# Altium PCB PCB1.PcbDoc
Units mil, origin at the board's own origin, x right, y up, seen from the top; angles counter-clockwise.
Board outline 1525.59 x 1230.31 mil, 2 copper layers (Top Layer, Bottom Layer); 34 components, 34 nets, 103 pads, 12 vias.
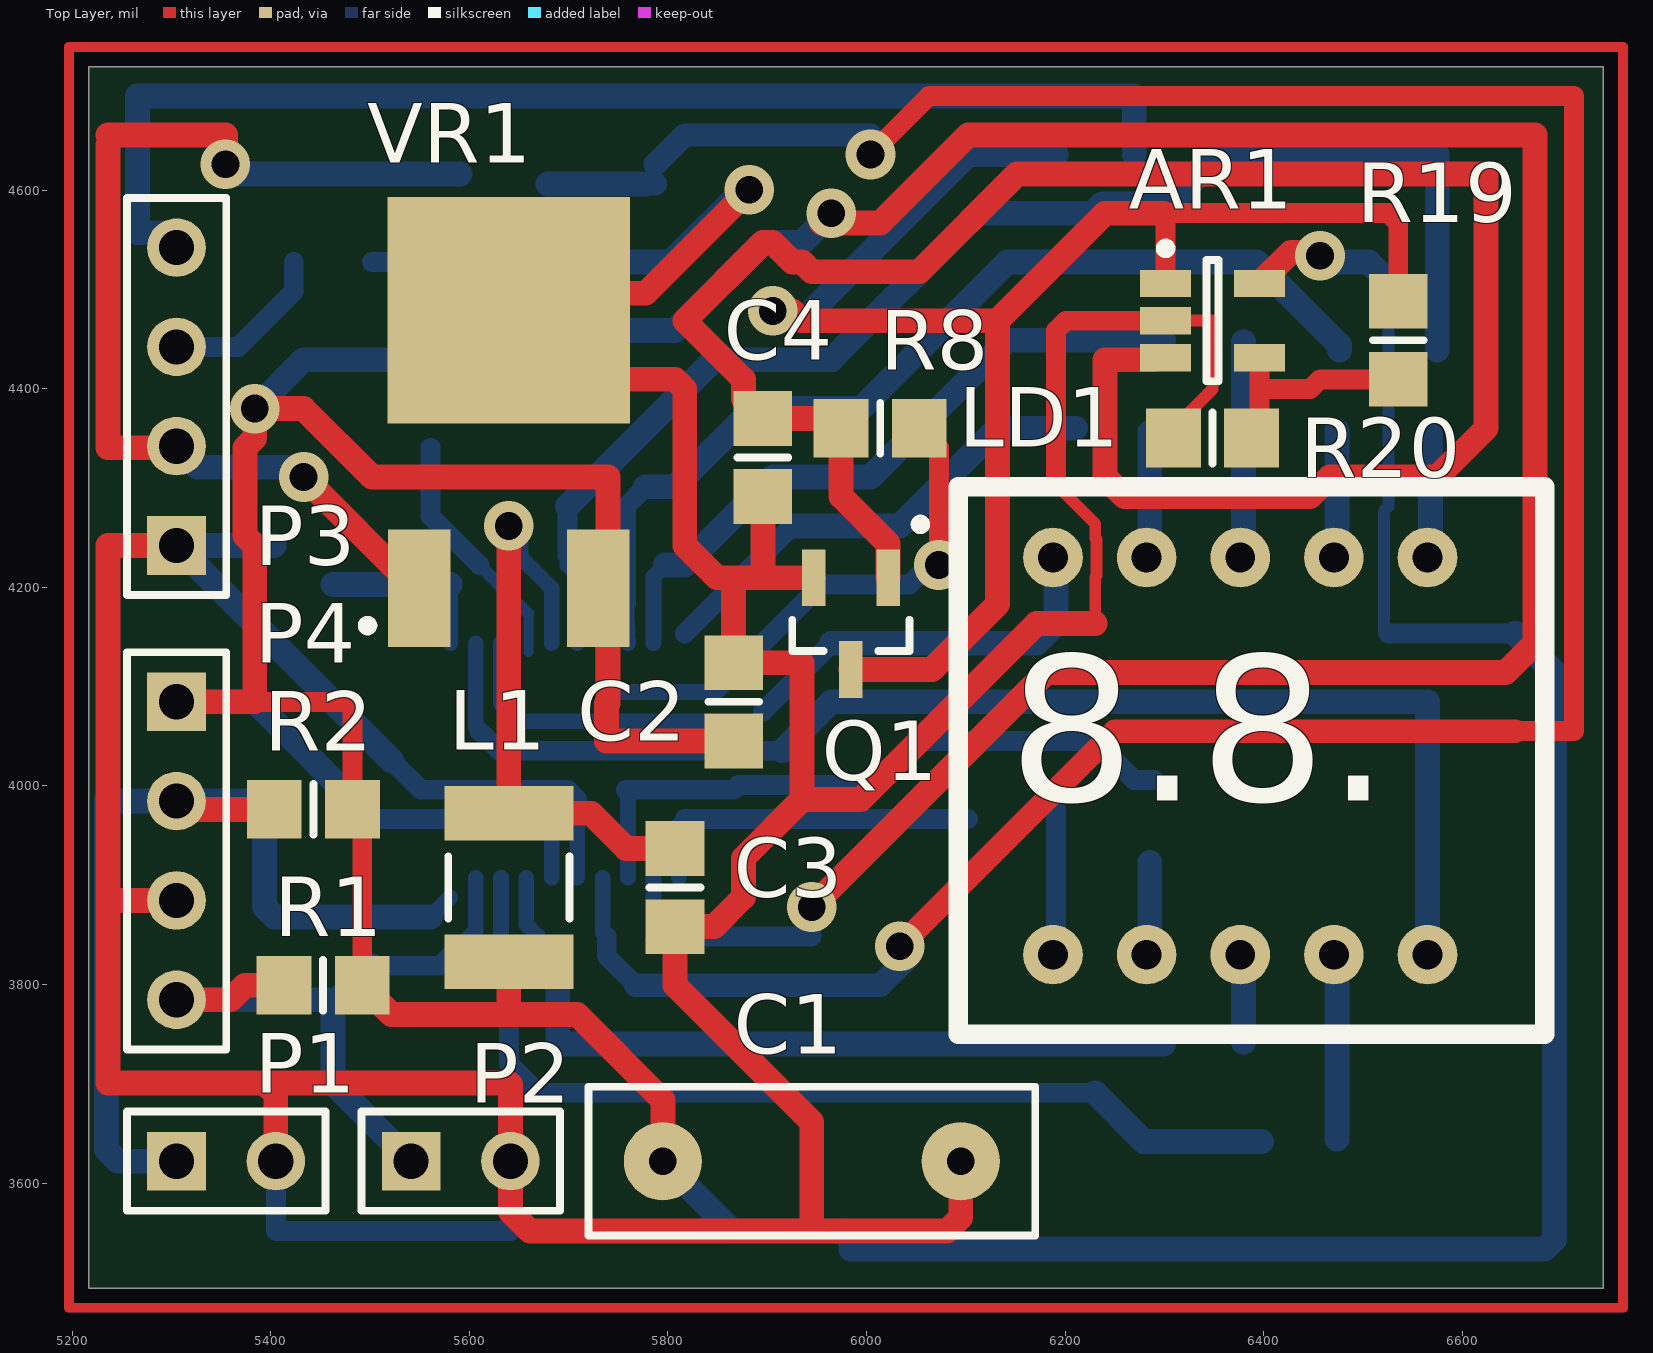
[diagram p0: Top Layer view]
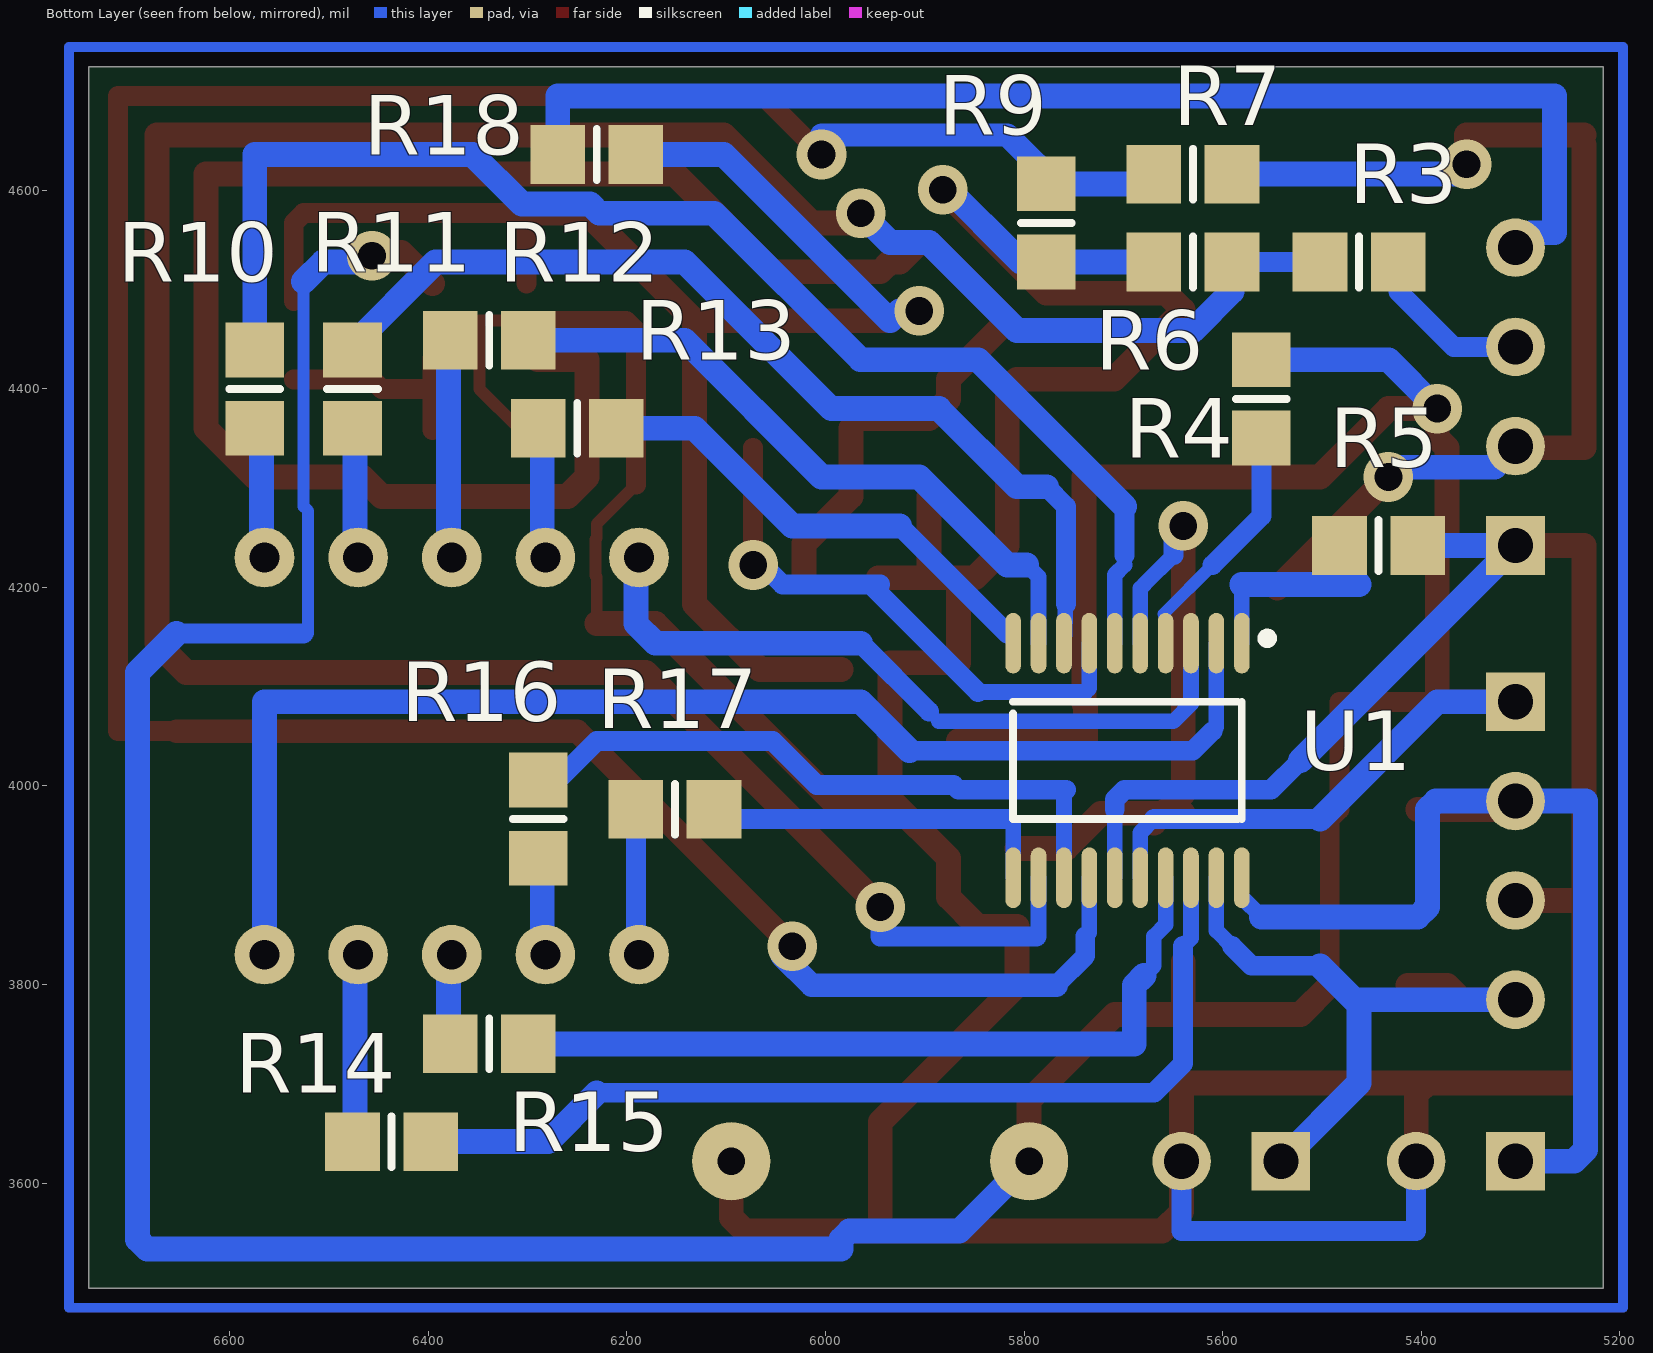
[diagram p1: Bottom Layer view, seen from below]

## Layer stack, top to bottom
Top Layer: signal copper 1.4
Dielectric: dielectric 12.6, FR-4, Dk 4.8
Bottom Layer: signal copper 1.4

## Board outline
5216.54,3494.09 6742.13,3494.09 6742.13,4724.41 5216.54,4724.41

## Design rules (kind name [scope] priority, off if disabled: settings)
AssemblyTestPointUsage [All] p1 off:
AssemblyTestpoint [All] p1 off: testpointundercomponent=TRUE minsize=40 maxsize=100 preferedsize=60 minholesize=0 maxholesize=40 preferedholesize=32 testpointgrid=1 usegrid=TRUE gridtolerance=0.01 allowsidetop=TRUE allowsidebottom=TRUE
Clearance Clearance_1 [All] p1: gap=7.87
Clearance Polygon [All vs IsRegion] p2: gap=78.74
FabricationTestPointUsage [All] p1 off: valid=0 allowmultiple=FALSE
FabricationTestpoint [All] p1 off: side=3 testpointundercomponent=TRUE minsize=40 maxsize=100 preferedsize=60 minholesize=0 maxholesize=40 preferedholesize=32 testpointgrid=1 allowsidetop=TRUE allowsidebottom=TRUE usegrid=TRUE gridtolerance=0.01
MinimumSolderMaskSliver [All] p1 off: minsoldermaskwidth=10
PasteMaskExpansion [All] p1 off: expansion=0
PolygonConnect [All] p1: connectstyle=Relief reliefconductorwidth=10 reliefentries=4 polygonreliefangle="90 Angle" airgapwidth=10
RoutingVias [All] p1: holewidth=28 width=50 viastyle="Through Hole" minholewidth=28 minwidth=50 maxholewidth=28 maxwidth=50
SilkToSilkClearance [All] p1 off: silktosilkclearance=10
SilkscreenOverComponentPads [All] p1 off: minsilkscreentomaskgap=10
SolderMaskExpansion [All] p1 off: expansion=4
Width [All] p1 off: maxlimit=10 minlimit=10 preferedwidth=10
20 further rules are at their usual default settings.

## Components (designator, comment, footprint, x,y, rotation, side; value= is the part's Value field where it differs from the comment)
AR1 "MCP6001" SOT23-5_M 6348.43,4468.5 r0 top
C1 "Cap Pol1" RAD-0.3 5944.88,3622.05 r0 top
C2 "Cap" 6-0805_M 5866.14,4084.65 r270 top
C3 "Cap" 6-0805_M 5807.09,3897.64 r90 top
C4 "Cap" 6-0805_M 5895.67,4330.71 r90 top
L1 "Inductor" INDC4532 5639.76,3897.64 r270 top
LD1 "BD-E323RD" DD-04 6092.52,3750 r0 top
P1 "Header 2" HDR1X2 5305.12,3622.05 r0 top
P2 "Header 2" HDR1X2 5541.34,3622.05 r0 top
P3 "Header 4" HDR1X4 5305.12,4242.13 r90 top
P4 "Header 4" HDR1X4 5305.12,4084.65 r270 top
Q1 "NPN_SIGNAL" SOT23_M 5984.25,4163.39 r270 top
R1 "4.7K" 6-0805_M 5452.76,3799.21 r180 top
R2 "4.7K" 6-0805_M 5442.91,3976.38 r180 top
R3 "0R" 6-0805_M 5462.6,4527.56 r0 bottom
R4 "1K" 6-0805_M 5561.02,4389.76 r270 bottom
R5 "1K" 6-0805_M 5442.91,4242.13 r0 bottom
R6 "HiZ" 6-0805_M 5629.92,4527.56 r0 bottom
R7 "10K" 6-0805_M 5629.92,4616.14 r0 bottom
R8 "1K" 6-0805_M 6013.78,4360.24 r0 top
R9 "1K" 6-0805_M 5777.56,4566.93 r270 bottom
R10 "200" 6-0805_M 6574.8,4399.61 r90 bottom
R11 "200" 6-0805_M 6476.38,4399.61 r90 bottom
R12 "200" 6-0805_M 6338.58,4448.82 r180 bottom
R13 "200" 6-0805_M 6250,4360.24 r180 bottom
R14 "200" 6-0805_M 6437.01,3641.73 r0 bottom
R15 "200" 6-0805_M 6338.58,3740.16 r0 bottom
R16 "200" 6-0805_M 6289.37,3966.54 r270 bottom
R17 "200" 6-0805_M 6151.57,3976.38 r0 bottom
R18 "10K-100K" 6-0805_M 6230.31,4635.83 r180 bottom
R19 "0R" 6-0805_M 6535.43,4448.82 r90 top
R20 "HiZ" 6-0805_M 6348.43,4350.39 r0 top
U1 "STM32F050F4P6" TSOP20 5708.66,4025.59 r270 bottom
VR1 "Volt Reg" DPAK 5639.76,4429.13 r90 top

## Footprints (in the part's own frame and the unit in brackets; to place one, negate y for a bottom-side part, rotate by r counter-clockwise, add the part's x,y. Pads: shape width x height; smd on the part's side, far side on the other; paste and mask are expansions set on the pad)
6-0805_M [mm] "Chip Resistor, Body 2.0x1.2mm, IPC Low Density"
  rect 1.4x1.5 smd: 1(-1,0) 2(1,0)
  silkscreen extent 0,-0.65 0,0.65, body extent -1.07,-0.7 1.07,0.7, height 0.7
DD-04 [mil] "светодиодный цифровой индикатор"
  round 60 hole 30: 1(95.28,80) 2(189.57,80) 3(283.86,80) 4(378.15,80) 5(472.44,80) 6(472.44,480) 7(378.15,480) 8(283.86,480) 9(189.57,480) 10(95.28,480)
  silkscreen extent 0,0 591,551
DPAK [mm]
  rect 3x1.6 smd: 1(-5.842,2.286) 3(-5.842,-2.286)
  rect 5.8x6.2 smd: 2(1.27,0)
  silkscreen extent -6.92,3.49 -6.68,3.74
HDR1X2 [mm] "Connector; Header; 2 Position"
  rect 1.5x1.5 hole 0.9: 1(0,0)
  round 1.5 hole 0.9: 2(2.54,0)
  silkscreen extent -1.27,-1.27 3.81,1.27
HDR1X4 [mm] "Connector; Header; 4 Position"
  rect 1.5x1.5 hole 0.9: 1(0,0)
  round 1.5 hole 0.9: 2(2.54,0) 3(5.08,0) 4(7.62,0)
  silkscreen extent -1.27,-1.27 8.89,1.27
INDC4532 [mm] "Chip Inductor, Body 4.5x3.2mm, IPC High Density"
  rect 1.4x3.3 smd: 1(-1.9,0) 2(1.9,0)
  silkscreen extent -0.8,-1.55 0.8,1.55, body extent -2.4,-1.7 2.4,1.7, height 0.55
RAD-0.3 [mm] "Radial Cap, Thru-Hole; 2 Leads; 0.3 in Pin Spacing"
  round 2 hole 0.7: 1(-3.81,0) 2(3.81,0)
  silkscreen extent -5.71,-1.91 5.71,1.91
SOT23-5_M [mm] "SOT23, 6-Leads, Body 2.9x1.6mm, Pitch 0.95mm, Lead Span 2.7mm, IPC Low Density"
  rect 1.3x0.7 smd: 1(-1.2,0.95) 2(-1.2,0) 3(-1.2,-0.95) 4(1.2,-0.95) 5(1.2,0.95)
  silkscreen extent -1.32,-1.55 0.15,1.97, body extent -0.9,-1.55 0.9,1.55, height 1.45
SOT23_M [mm] "SOT23, 3-Leads, Body 2.9x1.3mm, Pitch 0.95mm, Lead Span 2.3mm - Reverse Pinning, IPC Low Density"
  rect 1.45x0.6 smd: 1(-1.175,0.95) 2(-1.175,-0.95) 3(1.175,0)
  silkscreen extent -2.66,-1.5 0.7,1.9, body extent -0.7,-1.5 0.7,1.5, height 1.1
TSOP20 [mm] "STM32 маханький такой"
  oval 1.55x0.4 smd: 1(-3,3.25) 2(-3,2.6) 3(-3,1.95) 4(-3,1.3) 5(-3,0.65) 6(-3,0) 7(-3,-0.65) 8(-3,-1.3) 9(-3,-1.95) 10(-3,-2.6) 11(3,-2.6) 12(3,-1.95) 13(3,-1.3) 14(3,-0.65) 15(3,0) 16(3,0.65) 17(3,1.3) 18(3,1.95) 19(3,2.6) 20(3,3.25)
  silkscreen extent -3.25,-2.6 1.5,4.02

## Part data
AR1: "FET Operational Amplifier"
C1: "Polarized Capacitor (Radial)"
C2 C3 C4: "Capacitor"
P1 P2: "Header, 2-Pin"
P3 P4: "Header, 4-Pin"
Q1: "Low power NPN transistor"
R1 R2 R3 R4 R5 R6 R7 R8 R9 R10 R11 R12 R13 R14 R15 R16 R17 R18 R19 R20: library part Resistor
U1: "STM32 ARM-based 32-bit MCU with 16 Kbytes Flash, 20-pin"
VR1: "Voltage Regulator"

## Via types
v1: diameter 50, hole 28, Top Layer to Bottom Layer, 12 vias

## Nets (pads, with @x,y where several pads share a name; then routed paths per layer and width w, separated by ;. In a path a pad name is that pad's centre, name@x,y a point inside that pad or via, vN(x,y) a via of type N, cw(c..) or ccw(c..) an arc to the next point about the centre after c; other vN are vias at no path point)
ANALOG1: AR1.3 C4.2 Q1.1 R8.1 | length 2106.6
  Top Layer w25: R8.1@5964.57,4370.08 C4.2 5875.98,4389.76 5875.98,4409.45 5816.93,4468.5 5895.67,4547.24 5905.51,4547.24 5925.2,4527.56 5935.04,4527.56 5944.88,4517.72 6053.15,4517.72 6151.57,4616.14 6624.02,4616.14 6624.02,4360.24 6574.8,4311.02 6466.54,4311.02 6446.85,4291.34 6259.84,4291.34 6240.16,4311.02 6240.16,4429.13 AR1.3@6289.37,4429.13 ; R8.1 5974.41,4291.34 6021.65,4244.09 Q1.1
ANALOG2: AR1.1 Q1.3 R18.2 R19.2 | length 1652.5
  Top Layer w20: AR1.1 6301.18,4574.8 6299.21,4576.77 6525.59,4576.77 6535.43,4566.93 R19.2
  Top Layer w25: v1(5905.51,4478.35) 5925.2,4478.35 5935.04,4468.5 6131.89,4468.5 ; Q1.3 6065.94,4117.13 6131.89,4183.07 6131.89,4468.5 ; 6299.21,4576.77 6240.16,4576.77 6131.89,4468.5
  Bottom Layer w25: v1(5905.51,4478.35) 5925.2,4478.35 5935.04,4468.5 6102.36,4635.83 R18.2
CONTROL: P3.4 R18.1 | length 1225.2
  Bottom Layer w25: P3.4@5290.16,4557.09 5265.75,4557.09 5265.75,4694.88 6269.69,4694.88 R18.1
CURRENT: R3.2 R6.1 U1.12 | length 2894.1
  Top Layer w25: v1(5944.88,3877.95) 6181.1,4114.17 6643.7,4114.17 6673.23,4143.7 6673.23,4655.51 6102.36,4655.51 6013.78,4566.93 5954.72,4566.93 v1(5964.57,4576.77)
  Bottom Layer w15.75: U1.12 5785.43,3850.39 5787.4,3848.43
  Bottom Layer w20: R3.2 R6.1 ; 5787.4,3848.43 5944.88,3848.43 v1(5944.88,3877.95)
  Bottom Layer w25: 5590.55,4498.03 5629.92,4458.66 5807.09,4458.66 5895.67,4547.24 5935.04,4547.24 v1(5964.57,4576.77)
GND: AR1.2 C1.2 C2.1 C3.1 C4.1 P1.2 P2.2 P3.1 P4.3 Q1.2 R5.1 R6.2 R9.2 R20.1 U1.15 VR1.2 | length 5873
  Top Layer w12: 6190.94,4303.25 6230.31,4263.88 6230.31,4249.53 6231.67,4248.17 6231.67,4211.83 6230.31,4210.47 6230.31,4163.39 ; AR1.2 6348.43,4468.5 6348.43,4399.61 6309.06,4360.24 R20.1
  Top Layer w20: 6190.94,4303.25 6190.94,4458.66 6200.79,4468.5 AR1.2
  Top Layer w25: P4.3@5298.43,3877.95 P4.3 5242.91,3884.65 5236.22,3877.95 ; P3.1 5236.22,4242.13 5236.22,3877.95 ; P1.2 5405.12,3689.37 5393.7,3700.79 ; v1(5881.89,4600.39) 5777.56,4496.06 5656.69,4496.06 VR1.2 5709.45,4409.45 5807.09,4409.45 5816.93,4399.61 5816.93,4242.13 5849.41,4209.65 5873.03,4209.65 ; C4.1 5895.67,4209.65 ; Q1.2 5895.67,4209.65 ; C1.2 6094.88,3565.35 6081.1,3551.57 5944.88,3551.57 ; 6230.31,4163.39 6171.26,4163.39 5994.09,3986.22 5935.04,3986.22 ; 5236.22,3877.95 5236.22,3700.79 5393.7,3700.79 ; 5393.7,3700.79 5639.76,3700.79 5641.34,3699.21 P2.2 5641.34,3571.26 5661.02,3551.57 5944.88,3551.57 ; 5873.03,4209.65 5895.67,4209.65 ; 5873.03,4209.65 5866.14,4202.76 C2.1 5935.04,4124.02 5935.04,3986.22 ; 5935.04,3986.22 5875.98,3927.17 5875.98,3887.8 5846.46,3858.27 C3.1 5807.09,3799.21 5944.88,3661.42 5944.88,3551.57
  Bottom Layer w15.75: U1.15 5708.66,3976.38
  Bottom Layer w20: P1.2 5405.12,3551.57 5641.34,3551.57 P2.2 ; 5521.65,4025.59 5551.18,3996.06 5698.82,3996.06 5708.66,3986.22 5708.66,3976.38
  Bottom Layer w25: R5.1 P3.1 5521.65,4025.59 ; R6.2 R9.2 5803.15,4527.56 5881.89,4606.3 v1(5881.89,4600.39)
LEDCATODE1: LD1.5 U1.2 | length 1322.8
  Bottom Layer w15.75: 5606.3,4059.06 U1.2
  Bottom Layer w19.68: 5610.24,4055.12 5629.92,4035.43 5915.35,4035.43
  Bottom Layer w25: 5915.35,4035.43 5964.57,4084.65 6564.96,4084.65 6564.96,3834.17 LD1.5@6568.11,3831.02
LEDCATODE2: LD1.10 U1.3 | length 735.8
  Bottom Layer w12.13: 5885.83,4064.96 5895.67,4074.8
  Bottom Layer w15.75: U1.3 5631.89,4082.68 5649.61,4064.96 5885.83,4064.96
  Bottom Layer w20: 5895.67,4074.8 5964.57,4143.7
  Bottom Layer w25: 5964.57,4143.7 6171.26,4143.7 6190.94,4163.39 LD1.10@6190.94,4231.02
NetAR1_4: AR1.4 R19.1 R20.2 | length 216.7
  Top Layer w20: R20.2@6395.67,4358.27 6395.67,4399.61 ; AR1.4 6395.67,4399.61 ; R19.1 6456.69,4409.45 6446.85,4399.61 6395.67,4399.61
NetLD1_1: LD1.1 R17.2 | length 145.4
  Bottom Layer w20: LD1.1@6190.94,3831.02 R17.2
NetLD1_2: LD1.2 R16.2 | length 92
  Bottom Layer w25: LD1.2@6285.24,3831.02 R16.2@6285.24,3923.03
NetLD1_3: LD1.3 R15.2 | length 89.3
  Bottom Layer w25: R15.2@6379.53,3741.73 LD1.3@6379.53,3831.02
NetLD1_4: LD1.4 R14.2 | length 186.7
  Bottom Layer w25: R14.2@6473.82,3644.29 LD1.4@6473.82,3831.02
NetLD1_6: LD1.6 R10.1 | length 122.5
  Bottom Layer w25: LD1.6@6568.11,4231.02 R10.1@6568.11,4353.54
NetLD1_7: LD1.7 R11.1 | length 126.7
  Bottom Layer w25: LD1.7@6473.82,4231.02 R11.1@6473.82,4357.68
NetLD1_8: LD1.8 R12.1 | length 216.2
  Bottom Layer w25: LD1.8@6379.53,4231.02 R12.1@6379.53,4447.24
NetLD1_9: LD1.9 R13.1 | length 125.1
  Bottom Layer w25: LD1.9@6285.24,4231.02 R13.1@6285.24,4356.1
NetP1_1: P1.1 P4.2 R2.2 U1.20 | length 976.7
  Top Layer w25: P4.2@5313.39,3976.38 R2.2
  Bottom Layer w15.75: 5561.02,3868.11 U1.20@5580.71,3887.8
  Bottom Layer w25: P1.1 5246.06,3622.05 5234.65,3633.46 5234.65,3984.65 P4.2 5385.43,3984.65 5393.7,3976.38 5393.7,3877.95 5403.54,3868.11 5561.02,3868.11
NetP2_1: P2.1 P4.4 R1.2 U1.19 | length 687.6
  Top Layer w25: P4.4 5359.45,3784.65 5374.02,3799.21 R1.2
  Bottom Layer w15.75: 5590.55,3838.58 5606.3,3854.33 U1.19
  Bottom Layer w20: 5501.97,3818.9 5570.87,3818.9 5590.55,3838.58
  Bottom Layer w25: P4.4 5467.72,3784.65 5501.97,3818.9 ; 5462.6,3779.53 5462.6,3700.79 P2.1
NetP3_3: P3.3 R3.1 | length 170.8
  Bottom Layer w20: P3.3 5367.32,4442.13 5423.23,4498.03 R3.1
NetR4_2: R4.2 U1.4 | length 246.5
  Bottom Layer w10: U1.4@5659.45,4134.84 U1.4@5659.45,4173.23
  Bottom Layer w12.13: 5610.24,4222.44 U1.4@5659.45,4173.23
  Bottom Layer w20: R4.2@5561.02,4340.55 5561.02,4271.65 5610.24,4222.44
NetR5_2: R5.2 U1.1 | length 177.2
  Bottom Layer w15.75: U1.1 5580.71,4202.76
  Bottom Layer w25: 5462.6,4202.76 5580.71,4202.76
NetR8_2: R8.2 U1.7 | length 566.4
  Top Layer w20: v1(6072.83,4222.44) R8.2@6072.83,4340.55
  Bottom Layer w15.75: U1.7 5734.25,4098.43 5738.19,4094.49 5846.46,4094.49
  Bottom Layer w20: 5846.46,4094.49 5954.72,4202.76 ; 5944.88,4202.76 6043.31,4202.76 6062.99,4222.44 v1(6072.83,4222.44)
NetR10_2: R10.2 U1.6 | length 1361.5
  Bottom Layer w10: 5698.82,4222.44 5698.82,4232.28
  Bottom Layer w15.75: 5698.82,4222.44 5708.66,4212.6 U1.6
  Bottom Layer w20: 5698.82,4232.28 5698.82,4281.5
  Bottom Layer w25: 5698.82,4281.5 5846.46,4429.13 5964.57,4429.13 6112.2,4576.77 6227.85,4576.77 6237.01,4585.93 6305.68,4585.93 6355.58,4635.83 6574.8,4635.83 R10.2
NetR11_2: R11.2 U1.8 | length 997.8
  Bottom Layer w15.75: 5757.87,4183.07 U1.8
  Bottom Layer w20: 5757.87,4183.07 5757.87,4281.5 5777.56,4301.18
  Bottom Layer w25: 5777.56,4301.18 5807.09,4301.18 5885.83,4379.92 5994.09,4379.92 6141.73,4527.56 6392.72,4527.56 6476.38,4443.9 R11.2
NetR12_2: R12.2 U1.9 | length 679.4
  Bottom Layer w15.75: U1.9 5785.43,4210.63 5797.24,4222.44
  Bottom Layer w25: 5797.24,4222.44 5816.93,4222.44 5905.51,4311.02 6003.94,4311.02 6141.73,4448.82 R12.2
NetR13_2: R13.2 U1.10 | length 479.3
  Bottom Layer w20: U1.10@5816.93,4153.54 5925.2,4261.81
  Bottom Layer w25: 5925.2,4261.81 6033.46,4261.81 6131.89,4360.24 R13.2
NetR14_1: R14.1 U1.18 | length 980.8
  Bottom Layer w15.75: U1.18 5631.89,3846.46 5639.76,3838.58
  Bottom Layer w20: 5639.76,3838.58 5639.76,3720.47 5669.29,3690.94 6230.31,3690.94
  Bottom Layer w25: 6230.31,3690.94 6279.53,3641.73 R14.1
NetR15_1: R15.1 U1.17 | length 790.6
  Bottom Layer w15.75: U1.17 5657.48,3860.24 5669.29,3848.43 5669.29,3818.9 5679.13,3809.06
  Bottom Layer w25: 5679.13,3809.06 5688.98,3799.21 5688.98,3740.16 R15.1
NetR16_1: R16.1 U1.13 | length 657.6
  Bottom Layer w10: 5757.87,3996.06 5759.84,3994.09
  Bottom Layer w15.75: U1.13 5759.84,3994.09
  Bottom Layer w20: 5757.87,3996.06 5866.14,3996.06 5871.06,4000.98 6008.86,4000.98 6053.15,4045.28 6230.31,4045.28 6269.69,4005.91 R16.1
NetR17_1: R17.1 U1.11 | length 346.9
  Bottom Layer w15.75: U1.11 5811.02,3960.63 5816.93,3966.54
  Bottom Layer w20: 5816.93,3966.54 R17.1@6102.36,3966.54
V-: P3.2 R7.1 VR1.1 | length 1059.4
  Top Layer w25: 5236.22,4645.67 5236.22,4340.55 P3.2@5303.54,4340.55 ; 5236.22,4655.51 5354.33,4655.51 v1(5354.33,4625.98) ; v1(5433.07,4311.02) VR1.1@5544.96,4199.13
  Bottom Layer w25: P3.2 5326.38,4320.87 5423.23,4320.87 v1(5433.07,4311.02) ; v1(5354.33,4625.98) 5364.17,4616.14 R7.1
VCC: AR1.5 C1.1 C2.2 L1.2 P4.1 R1.1 R2.1 R4.1 U1.16 VR1.3 | length 4899.4
  Top Layer w20: 5383.86,4084.65 5482.28,4084.65 R2.1 5492.13,3966.54 R1.1
  Top Layer w25: P4.1 5383.86,4084.65 5383.86,4242.13 5374.02,4251.97 5374.02,4340.55 5383.86,4350.39 v1(5383.86,4379.92) 5433.07,4379.92 5501.97,4311.02 5739.76,4311.02 5739.76,4083.07 ; R1.1 5521.65,3769.68 5639.76,3769.68 ; L1.2 5639.76,3769.68 ; 5738.19,4083.07 5738.19,4045.28 C2.2 ; C1.1 5794.88,3683.46 5708.66,3769.68 5639.76,3769.68 ; AR1.5 6427.17,4537.4 6453.19,4537.4 v1(6456.69,4533.9)
  Bottom Layer w12: 6521.09,4153.54 6521.09,4276.99 6525.59,4281.5 6525.59,4507.87
  Bottom Layer w15.75: 5669.29,3966.54 5683.07,3952.76 U1.16
  Bottom Layer w20: 5501.97,3966.54 5669.29,3966.54 ; 6525.59,4153.54 6653.54,4153.54
  Bottom Layer w25: P4.1 5383.86,4084.65 5501.97,3966.54 ; v1(5383.86,4379.92) 5433.07,4429.13 R4.1 ; C1.1 5865.35,3551.57 5975.98,3551.57 5984.25,3543.31 5984.25,3533.46 6683.07,3533.46 6692.91,3543.31 6692.91,4114.17 6653.54,4153.54 ; v1(6456.69,4533.9) 6463.03,4527.56 6505.91,4527.56 6525.59,4507.87
VCCLC: C3.2 L1.1 U1.5 | length 604.2
  Top Layer w25: L1.1 5722.44,3972.44 5757.87,3937.01 C3.2 ; v1@5639.76,4242.13 5639.76,3992.13 L1.1@5669.29,3962.6
  Bottom Layer w15.75: 5649.61,4232.28 5679.13,4202.76 ; U1.5 5683.07,4198.82
  Bottom Layer w20: v1(5639.76,4261.81) 5649.61,4251.97 5649.61,4232.28
VOLTAGE: R7.2 R9.1 U1.14 | length 2902.6
  Top Layer w20: v1(6003.94,4635.83) 6062.99,4694.88 6712.6,4694.88 6712.6,4055.12 6653.54,4055.12
  Top Layer w23.62: v1(6033.46,3838.58) 6250,4055.12 6653.54,4055.12
  Bottom Layer w15.75: U1.14 5734.25,3852.36 5738.19,3848.43
  Bottom Layer w19.68: 5738.19,3848.43 5738.19,3828.74 5767.72,3799.21
  Bottom Layer w23.62: 5767.72,3799.21 6013.78,3799.21 6043.31,3828.74 v1(6033.46,3838.58) ; R9.1 R9.1@5787.4,4606.3 ; R9.1@5787.4,4625.98 5816.93,4655.51 v1@6003.94,4655.51
  Bottom Layer w25: R7.2@5679.13,4606.3 R9.1

## Other copper
Multi-Layer:
  lines w10: 5196.85,3474.41 6761.81,3474.41 6761.81,4744.09 5196.85,4744.09 5196.85,3474.41

## Text inside footprints (layer, text, board x,y; h text height)
LD1: Top Overlay "8.8." at 6142.52,3925 h314.96